# EAGLE board communication-hub (EAGLE 9.6.1)
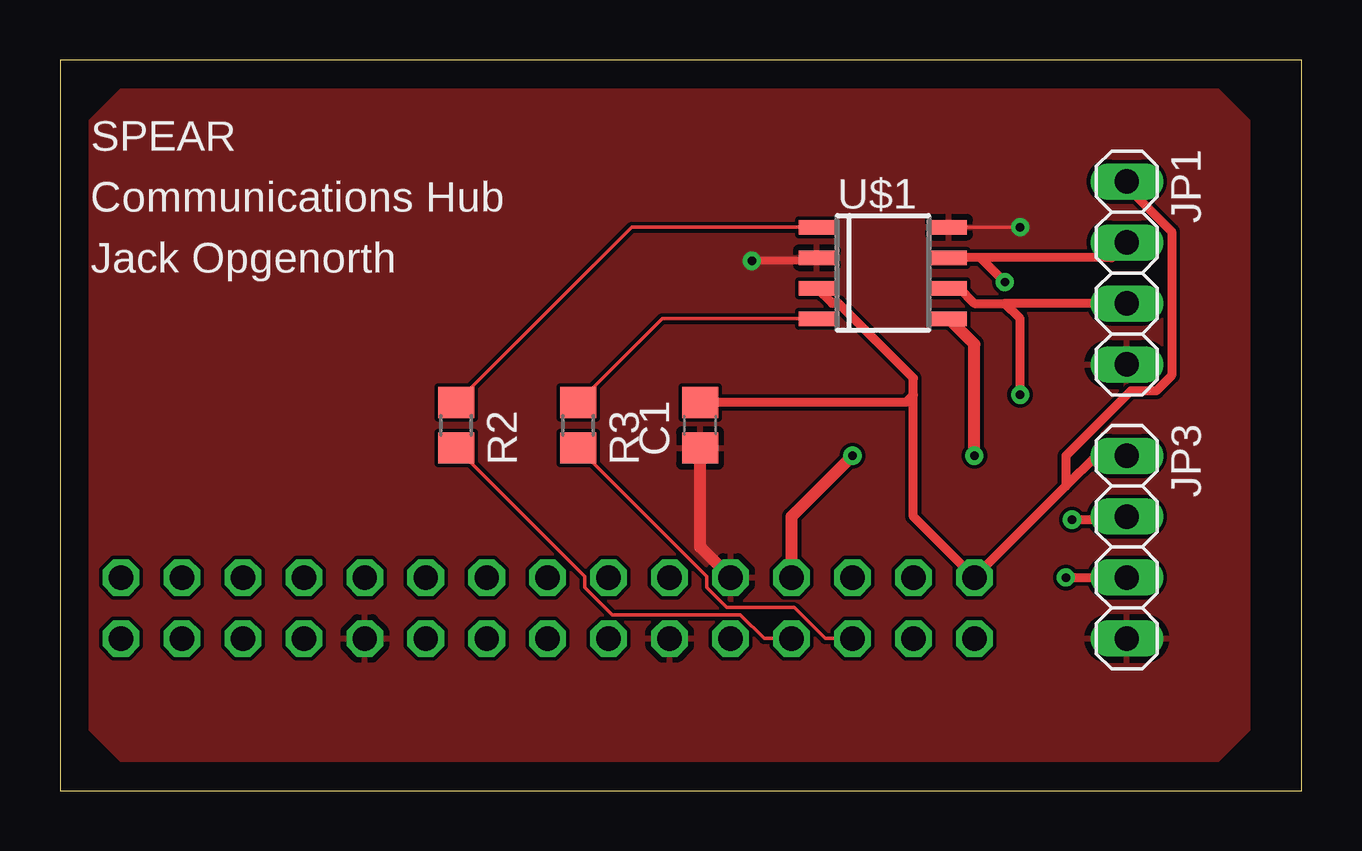
[diagram p0: board, top side]
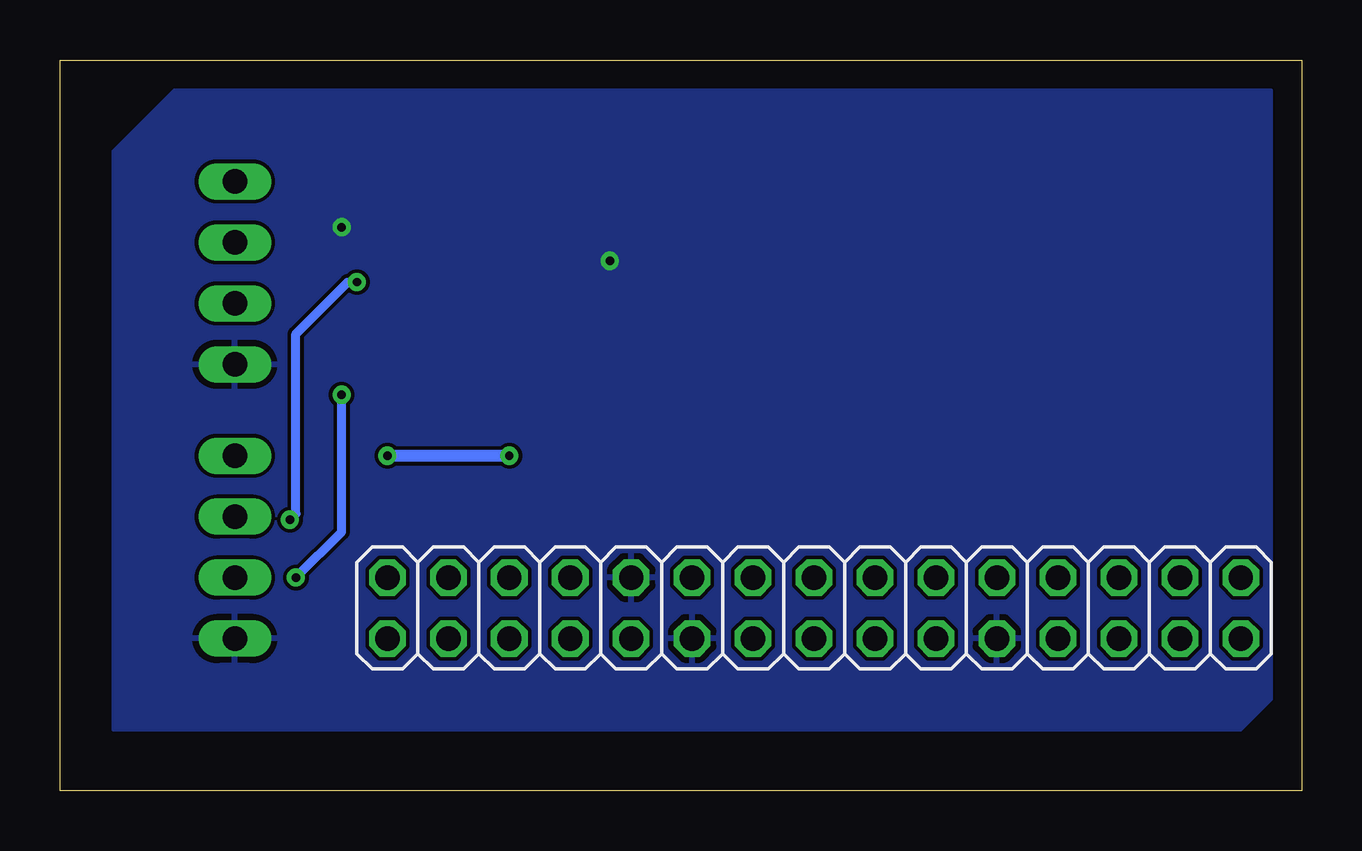
[diagram p1: board, bottom side, seen from below]

Size 51.74 x 30.47 mm. Coordinates in mm from the lower left corner, seen from the top.
Outline: 0,0 51.74,0 51.74,30.47 0,30.47 0,0
Copper layers (1*16): Top 0.035mm / dielectric 1.5mm / Bottom 0.035mm
Design rules "default": minimum track width 6mil, minimum drill 0.35mm, track to track 6mil, track to pad 6mil, pad to pad 6mil, via to via 6mil, smd to smd 6mil, copper to edge 40mil, drill to drill 6mil, minimum pad ring 10mil, minimum via ring 8mil, stop-mask expansion 4mil, vias tented up to drill 0mil, thermal gap 10mil

## Footprints (pad centres in the part's own frame; a part is rotated, then mirrored left to right if it is on the bottom)
C0805 = smd 1.3 x 1.5: 1 -0.95,0; 2 0.95,0
1X04 = drill 1.016 long: 1 -3.81,0; 2 -1.27,0; 3 1.27,0; 4 3.81,0
2X15 = drill 1.016 octagon: 1 -17.78,-1.27; 2 -17.78,1.27; 3 -15.24,-1.27; 4 -15.24,1.27; 5 -12.7,-1.27; 6 -12.7,1.27; 7 -10.16,-1.27; 8 -10.16,1.27; 9 -7.62,-1.27; 10 -7.62,1.27; 11 -5.08,-1.27; 12 -5.08,1.27; 13 -2.54,-1.27; 14 -2.54,1.27; 15 0,-1.27; 16 0,1.27; 17 2.54,-1.27; 18 2.54,1.27; 19 5.08,-1.27; 20 5.08,1.27; 21 7.62,-1.27; 22 7.62,1.27; 23 10.16,-1.27; 24 10.16,1.27; 25 12.7,-1.27; 26 12.7,1.27; 27 15.24,-1.27; 28 15.24,1.27; 29 17.78,-1.27; 30 17.78,1.27
R0805 = smd 1.3 x 1.5: 1 -0.95,0; 2 0.95,0
SOIC8 = smd 0.6 x 1.5: 1 -1.905,-2.75; 2 -0.635,-2.75; 3 0.635,-2.75; 4 1.905,-2.75; 5 1.905,2.75; 6 0.635,2.75; 7 -0.635,2.75; 8 -1.905,2.75

## Placement (x,y rotation side)
C1  10uf  [C0805]  26.67,15.24 90 top
JP1  [1X04]  44.45,21.59 270 top
JP2  [2X15]  20.32,7.62 0 bottom
JP3  [1X04]  44.45,10.16 270 top
R2  220  [R0805]  16.51,15.24 270 top
R3  220  [R0805]  21.59,15.24 270 top
U$1  MCP2562-E/SN  [SOIC8]  34.29,21.59 270 top

## Library data of the parts
C1 = rcl; SPICEPREFIX: C
JP1-JP3 = pinhead
R2 R3 = rcl; SPICEPREFIX: R
U$1 = SPEAR-general

## Nets
+3V3: JP2.8 U$1.5
+5V: C1.2 JP1.1 JP2.2 JP3.1 U$1.3
CAN_H: JP1.2 JP3.2 U$1.7
CAN_L: JP1.3 JP3.3 U$1.6
CAN_RXD: JP2.5 R3.2
CAN_TXD: JP2.7 R2.2
GND: C1.1 JP1.4 JP2.10 JP2.11 JP2.21 JP3.4 U$1.2 U$1.8
N$3: R3.1 U$1.4
N$4: R2.1 U$1.1

## Tracks (layer width: path | path; a pad name or v marks a point on that pad's centre or on a via)
+3V3  (via drill 0.35)
  Top 0.508: JP2.8 30.48,11.43 v33.02,13.97 | v38.1,13.97 38.1,18.62 U$1.5
  Bottom 0.508: v33.02,13.97 v38.1,13.97
+5V
  Top 0.381: U$1.3 32.17,20.33 32.43,20.33 35.56,17.2 35.56,16.51 | 35.56,16.51 35.56,11.43 JP2.2 41.91,12.7 | 41.91,12.7 43.18,13.97 JP3.1 | JP1.1 44.45,25.18 46.32,23.32 46.32,17.32 45.67,16.68 44.62,16.68 41.91,13.97 41.91,12.7 | 35.56,16.51 35.24,16.19 C1.2
CAN_H  (via drill 0.35)
  Top 0.152: JP3.2 44.32,11.3
  Top 0.381: JP1.2 43.82,22.23 38.35,22.23 | 38.35,22.23 U$1.7 | 44.32,11.3 v42.16,11.3 | v39.37,21.21 38.35,22.23
  Bottom 0.381: v42.16,11.3 41.91,11.56 41.91,19.05 39.75,21.21 v39.37,21.21
CAN_L  (via drill 0.35)
  Top 0.381: JP1.3 39.37,20.32 | v40.01,16.51 40.01,19.68 39.37,20.32 | v41.91,8.89 JP3.3 | 39.37,20.32 38.1,20.32 37.46,20.95 U$1.6
  Bottom 0.381: v41.91,8.89 40.01,10.79 v40.01,16.51
CAN_RXD
  Top 0.152: R3.2 26.95,8.93 26.95,8.48 27.78,7.64 30.59,7.64 31.88,6.35 JP2.5
CAN_TXD
  Top 0.152: R2.2 21.87,8.93 21.87,8.48 23.01,7.34 28.35,7.34 29.34,6.35 JP2.7
GND  (via drill 0.35)
  Top 0.152: U$1.2 31.41,22.1 | U$1.8 v40.01,23.5
  Top 0.305: 31.41,22.1 v28.83,22.1
  Top 0.508: JP2.10 26.67,10.16 C1.1
  pour Top: 1.27,27.94 1.27,2.54 2.54,1.27 48.26,1.27 49.53,2.54 49.53,27.94 48.26,29.21 2.54,29.21
  pour Bottom: 1.27,29.21 1.27,3.81 2.54,2.54 49.53,2.54 49.53,26.67 48.26,27.94 46.99,29.21
N$3
  Top 0.152: R3.1 25.09,19.68 U$1.4
N$4
  Top 0.152: R2.1 23.82,23.5 U$1.1

## Text on the board
_tsilk: SPEAR | Communications Hub | Jack Opgenorth